# Altium PCB ESP32 with USBC PCB V1.PcbDoc (part 2 of 2)
Units mil, origin at the board's own origin, x right, y up, seen from the top; angles counter-clockwise.
Board outline 2700 x 1000 mil, 4 copper layers (L1, L2, L3, L4), stack 61.581 mil thick; 66 components, 75 nets, 307 pads, 155 vias.
Unrouted connection lines stored in the file: 1.
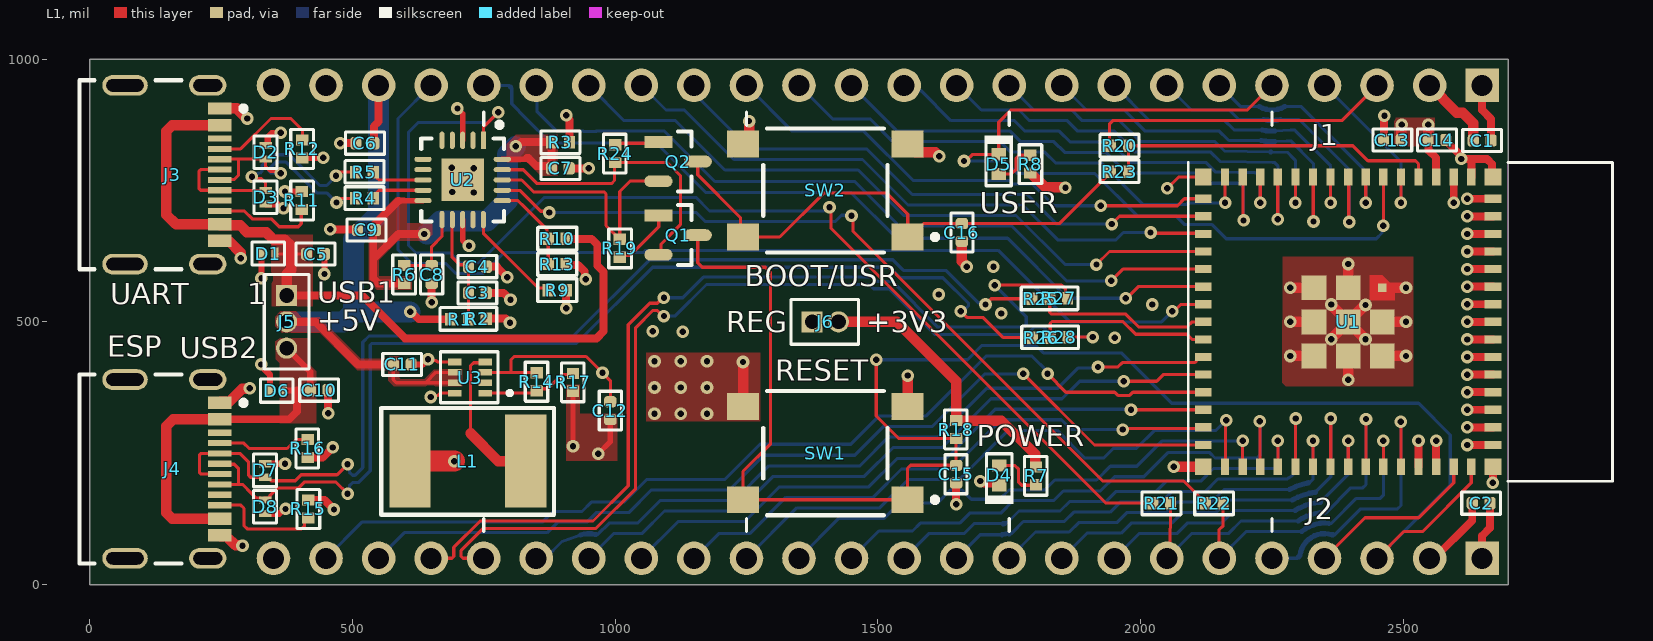
[diagram p0: L1 view]

## Via types
v1: diameter 24, hole 12, L1 to L4, tented both sides, 155 vias

## Nets (pads, with @x,y where several pads share a name; then routed paths per layer and width w, separated by ;. In a path a pad name is that pad's centre, name@x,y a point inside that pad or via, vN(x,y) a via of type N, cw(c..) or ccw(c..) an arc to the next point about the centre after c; other vN are vias at no path point) (continued)
GPIO11: (continued)
  L4 w6: J1.14 1414,886 1485.72,886 1528.72,843 1733,843 1753,823 1818,823 1838.64,802.36 1925.79,802.36 2005.15,723 2086.4,723 2089.83,726.43 v1(2160.79,726.43)
GPIO12: J1.15 U1.16 | length 969.8
  L1 w6: v1(1924,721) 2070.18,721 2083.44,734.25 U1.16
  L4 w6: J1.15 1337,863 1473.42,863 1567.42,769 1750.43,769 1757.07,762.36 1794,762.36 1835.36,721 v1(1924,721)
GPIO13: J1.16 U1.17 | length 1093.7
  L1 w6: v1(1945,686) 1959.79,700.79 U1.17
  L4 w6: J1.16 1150,935.39 1165.73,919.65 1165.73,919.27 1256,829 1479.14,829 1565.78,742.36 1784,742.36 1840.36,686 v1(1945,686)
GPIO14: J1.17 U1.18 | length 1198.1
  L1 w6: v1(2019,670) 2020.34,668.66 2118.11,668.66 U1.18
  L4 w6: J1.17 1097,903 1132,903 1226,809 1470.85,809 1557.49,722.36 1775.72,722.36 1842.07,656 1953.18,656 1967.18,670 v1(2019,670)
GPIO15: J1.18 U1.19 | length 1321
  L1 w6: v1(1916,609) 1940.86,633.86 U1.19
  L4 w6: J1.18 1017,883 1115,883 1209,789 1462.57,789 1549.21,702.36 1763,702.36 1856.36,609 v1(1916,609)
GPIO16: J1.19 U1.20 | length 1461.8
  L1 w6: v1(1944,578) 1966.39,600.39 U1.20
  L4 w6: J1.19 851.14,948.86 851.14,900.86 889,863 939.82,863 940.82,862 963.18,862 964.18,863 1094,863 1190,767 1456.28,767 1540.93,682.36 1754.72,682.36 1859.07,578 v1(1944,578)
GPIO17: J1.20 U1.21 | length 1563.9
  L1 w6: v1(1972,545) 1973.4,545 1995.33,566.93 U1.21
  L4 w6: J1.20 798.03,950 800.95,947.07 803.3,944.73 803.3,914.7 831.2,886.8 877.64,840.36 1078.64,840.36 1173,746 1449,746 1536,659 1747,659 1861,545 v1(1972,545)
GPIO18: J1.21 U1.22 | length 1978.6
  L1 w6: v1(2060,520) 2063.79,520 2077.02,533.23 2119.22,533.23 U1.22
  L4 w6: J1.21 587,887 587,637 613,611 678,611 697,592 749.1,592 789.1,632 1054.31,632 1058.32,636.01 1728.99,636.01 1865,500 2040,500 v1(2060,520)
GPIO21: J2.19 U1.25 | length 1426.1
  L1 w6: v1(1919,414) 1956.82,414 1965.3,422.48 2102.84,422.48 2108.7,428.34 2108.7,430.2 2111.57,433.07 U1.25
  L4 w6: J2.19 867,50 899,82 934.41,94.34 ; 961.84,95.48 963.06,95.48 967.2,95.48 988.72,117 1042.72,117 1085.72,160 1226.72,160 1292.72,226 1466.15,226 1521.15,281 1614.43,281 1707,373.57 1842.28,373.57 1880.72,412 1917,412 v1(1919,414)
  L4 w10: 934.41,94.34 cw(c950,50) 961.84,95.48
GPIO26: J2.18 U1.26 | length 1314.3
  L1 w6: v1(1968,387) 2030.61,387 2043.21,399.61 U1.26
  L4 w6: J2.18 997,97 1051,97 1094,140 1235,140 1301,206 1474.43,206 1529.43,261 1622.72,261 1715.28,353.57 1850.57,353.57 1884,387 v1(1968,387)
GPIO33: J2.17 U1.28 | length 1187.3
  L1 w6: v1(1981.68,332.68) U1.28
  L4 w6: J2.17 1120,120 1247,120 1313,186 1482.72,186 1536.72,240 1630,240 1723.57,333.57 1980.79,333.57 v1(1981.68,332.68)
GPIO34: J2.16 U1.29 | length 1088.1
  L1 w6: v1(1966,295) 1968.11,297.11 2117.34,297.11 U1.29
  L4 w6: J2.16 1197,97 1256,97 1325,166 1491,166 1545,220 1641,220 1734.57,313.57 1849.42,313.57 1867.99,295 v1(1966,295)
GPIO35: J2.15 U1.31 | length 1155
  L1 w6: U1.31 2161.89,225.52 2161.89,311.89 v1(2163,313)
  L4 w6: J2.15 1346,146 1503.72,146 1557.72,200 1654.82,200 1748.38,293.57 1841.14,293.57 1893.7,241 1930.04,241 1948.04,259 1992.07,259 2026.64,293.57 2143.57,293.57 v1(2163,313)
GPIO36: J2.14 U1.32 | length 1000.7
  L1 w6: U1.32 v1(2194.25,273.57)
  L4 w6: J2.14 1426,126 1512,126 1541,155 1612.82,155 1637.82,180 1660.41,180 1678.12,162.3 1732.01,162.3 1749.72,180 1818,180 1837,199 1916.32,199 1942.5,225.18 1993,225.18 2041.38,273.57 v1(2194.25,273.57)
GPIO37: J2.13 U1.33 | length 1019
  L1 w6: v1(2227,311) 2227.36,310.64 2227.36,224.77 U1.33
  L4 w6: J2.13 1502,102 1566,102 1581,117 1655.72,117 1674.72,136 1734,136 1758,160 1835,160 1853,178 1923.61,178 1950.79,205.18 2006,205.18 2052.02,251.2 2131.48,251.2 2141.68,241 2221.86,241 2227.72,246.86 2227.72,310.28 v1(2227,311)
GPIO38: J2.12 U1.34 | length 879.5
  L1 w6: U1.34 v1(2261.18,273.57)
  L4 w6: J2.12 1597,97 1664,97 1683,116 1738.47,116 ; 1741.46,116.45 1741.99,116.52 1748.64,119.93 ; 1748.68,119.96 1768.72,140 1846.72,140 1864.72,158 1933.72,158 1952.72,177 2029,177 2049,197 2114.72,197 2138.72,221 2255.32,221 2261.18,226.86 v1(2261.18,273.57)
  L4 w10: 1738.47,116 cw(c1750,50) 1741.46,116.45
GPIO39: J2.11 U1.35 | length 905.4
  L1 w6: U1.35 2294.82,224.59 2294.82,315.82 v1(2295,316)
  L4 w6: J2.11 1695,95 1736.44,95 ; 1750,97 1754,97 1756.93,99.93 1777,120 1855,120 1873,138 1942,138 1961,157 2039,157 2059,177 2123,177 2147,201 2276.46,201 2278.67,201 2287.9,206.99 2289.12,207.97 2289.91,208.68 2295,213.77 v1(2295,316)
  L4 w10: 1736.44,95 cw(c1750,50) 1750,97
GPIO40: J2.10 U1.36 | length 759.7
  L1 w6: U1.36 v1(2328.11,273.57)
  L4 w6: J2.10 1800,100 1864,100 1882,118 1954.72,118 1973.72,137 2049,137 2069,157 2134.72,157 2158.72,181 2280.95,181 2283.31,181 ; 2319.62,193.83 2322.25,194.38 2328.11,200.24 v1(2328.11,273.57)
  L4 w10: 2283.31,181 cw(c2350,50) 2319.62,193.83
GPIO41: J2.9 U1.37 | length 775.4
  L1 w6: U1.37 2361.79,224.62 2361.79,315.79 v1(2362,316)
  L4 w6: J2.9 1898,98 1963,98 1982,117 2059,117 2079,137 2143,137 2167,161 2288.29,161 ; 2332.72,175.82 2362,205.1 v1(2362,316)
  L4 w10: 2288.29,161 cw(c2350,50) 2332.72,175.82
GPIO42: J2.8 U1.38 | length 620.6
  L1 w6: U1.38 v1(2395.04,273.57)
  L4 w6: J2.8 1997,97 2068.72,97 2088.72,117 2154,117 2178,141 2293.72,141 ; 2341.87,156.69 2395.04,209.86 v1(2395.04,273.57)
  L4 w10: 2293.72,141 cw(c2350,50) 2341.87,156.69
GPIO45: J2.5 U1.41 | length 538.2
  L1 w6: v1(2495,310) 2495.22,309.78 2495.22,224.63 U1.41
  L4 w6: J2.5 2298.03,50 2300.95,52.93 2303.3,55.27 ; 2364.19,94.81 2365.66,94.81 2369.81,94.81 2419,144 2489,144 2495.43,150.43 2495.43,309.57 v1(2495,310)
  L4 w10: 2303.3,55.27 cw(c2350,50) 2364.19,94.81
GPIO46: J2.4 U1.44 | length 336
  L1 w6: J2.4 2427.08,127.08 2529.08,127.08 2595.83,193.83 U1.44
GPIO47: J2.23 U1.27 | length 1864.8
  L1 w6: v1(1823,401) 1857.86,366.14 1950.67,366.14 1956.82,360 1979.18,360 1985.33,366.14 U1.27
  L4 w6: J2.23 519.28,119.28 862.72,119.28 882.43,139 937,139 955,157 1017,157 1060,200 1208.72,200 1275.72,267 1448.72,267 1502.72,321 1592,321 1706,435 1792.79,435 1823,404.79 v1(1823,401)
GPIO48: J2.22 U1.30 | length 1770.9
  L1 w6: v1(1777,401) 1912.25,265.75 U1.30
  L4 w6: J2.22 599,99 870.72,99 890.72,119 946,119 964,137 1026,137 1069,180 1217,180 1283,246 1456,246 1511,301 1604,301 1704,401 v1(1777,401)
NetD4_2: D4.2 R7.1 | length 100.4
  L1 w6: D4.2 1760.7,226.7 1768,219.4 1768,194.86 1773.86,189 1800.01,189 R7.1
NetD5_2: D5.2 R8.1 | length 87.1
  L1 w6: D5.2 1754.29,781.3 1763.13,790.14 1763.13,811.15 1768.99,817.01 R8.1
NetJ3_A5: J3.A5 R12.2 | length 209.4
  L1 w6: J3.A5 287.44,829.13 345.3,887 383,887 405,865 R12.2
NetJ3_B5: J3.B5 R11.2 | length 197.8
  L1 w6: J3.B5 294.72,711.02 309.73,696.01 345.93,696.01 360.94,681 397.14,681 403,686.86 403,712.98 R11.2
NetJ4_A5: J4.A5 R16.2 | length 178.7
  L1 w6: J4.A5 293.71,269.29 303.98,259.02 376.02,259.02 393.02,276.02 R16.2
NetJ4_B5: J4.B5 R15.2 | length 220.8
  L1 w6: J4.B5 287.82,151.18 294,145 294,111.86 299.86,106 403.33,106 409.19,111.86 409.19,121.37 414.82,127 R15.2
NetL1_1: L1.1 U3.4 | length 286.5
  L1 w6: 724.94,288.06 724.94,416.37 730.8,422.23 751.64,422.23 U3.4
  L1 w20: 724.94,288.06 778,235 L1.1
NetQ1_1: Q1.1 R19.2 | length 119.6
  L1 w6: R19.2 1012.83,626.82 1028.82,626.82 1083,681 1083,701.98 Q1.1
NetQ2_1: Q2.1 R24.2 | length 84.8
  L1 w6: R24.2 1002.7,839.7 1079.88,839.7 Q2.1
NetR9_1: R9.1 U2.15 | length 194.7
  L1 w6: U2.15 749.37,677 749.37,668.63 785.59,632.41 785.78,632.41 822,596.18 822,596 853.67,564.33 868.66,564.33 R9.1
NetR14_1: R14.1 R17.2 U3.1 | length 190.1
  L1 w6: U3.1 846.48,364.47 853.64,371.64 R14.1 854.82,372.82 871.82,372.82 899.05,400.05 918.04,400.05 R17.2
RTS_FTDI: Q1.2 R24.1 U2.19 | length 564.2
  L1 w6: U2.19 785.64,789.46 806.91,789.46 807,789.37 825.63,789.37 852,763 993.14,763 999,768.86 999,801.99 R24.1 1099.78,802.99 1124.29,778.48 1124.29,684.93 1087.37,648 1087.37,632.39 Q1.2
RXD_FTDI: R21.2 U2.1 | length 2217.7
  L1 w6: U2.1 749.37,870.37 v1(778,899) ; v1(1408,718) 1410.68,715.32 1410.68,678.5 1934.18,155 R21.2
  L4 w6: v1(778,899) 758,879 625,879 607,861 607,645.28 621.28,631 686.28,631 705.28,612 740.82,612 865.63,736.81 1153.9,736.81 1179.72,711 1397.21,711 1404.21,718 v1(1408,718)
TXD_FTDI: R22.2 U2.17 | length 1610.5
  L1 w6: U2.17 785.64,750.09 818.91,750.09 827,742 858.65,710.35 872.65,710.35 v1(875,708) ; v1(1450,702) 1452.68,699.32 1452.68,672.32 1927.8,197.2 2081.97,197.2 2122.99,156.18 R22.2
  L4 w6: v1(875,708) 1154.43,708 1171.43,691 1419.18,691 1431,702.82 1449.18,702.82 v1(1450,702)
U0RXD: J2.6 R22.1 U1.40 | length 620.7
  L1 w6: J2.6 2149,51 2149,104 2157.01,112.01 R22.1 ; U1.40 v1(2461.97,273.57)
  L4 w6: J2.6 2201,101 2306.55,101 ; 2358.43,116.47 2363.18,116.47 2410.72,164 2456.11,164 2461.97,169.86 v1(2461.97,273.57)
  L4 w10: 2306.55,101 cw(c2350,50) 2358.43,116.47
U0TXD: J2.7 R21.1 U1.39 | length 757.2
  L1 w6: J2.7 2056,56 2056,107 2057.01,108.01 R21.1 ; U1.39 2428.75,224.66 2428.75,314.75 v1(2429,315)
  L4 w6: J2.7 2097,97 2167,97 2191,121 2296.63,121 2299.72,121 ; 2351.1,136.99 2352.99,136.99 2400,184 2422.65,184 2429,190.35 v1(2429,315)
  L4 w10: 2299.72,121 cw(c2350,50) 2351.1,136.99
VBUS_SENSE: R10.1 R13.2 U2.16 | length 175.6
  L1 w6: U2.16 815.37,730.63 827,719 870.7,675.3 870.7,660.29 R10.1 ; R13.2 R10.1@872.99,659.18
pads on no net: J1.24 J3.A8 J3.B8 J4.A8 J4.B8 U2.2 U2.4 U2.5 U2.6 U2.7 U2.14 U3.2

## Polygon pours and split planes (outlines as drawn)
+3V3_FTDI on L1 "+3V3_FTDI_L01_P004" (solid, pour order 4): 613.22,560.7 546.22,560.7 531,577.9 531,684.72 540,694 544.22,698.7 584.22,738.7 603.22,738.7 603.22,687.7 652.22,687.7 652.22,659.7 647.22,654.7 587.7,654.7 550,617 550,586.7 613.22,586.7
GND on L1 "GND_L01_P008" (solid, pour order 8): 2270.5,624 2519,624 2519,377 2269.5,377
GND on L1 "GND_L01_P010" (solid, pour order 10): 1059,441 1059,311 1276,311 1276,441
GND on L1 "GND_L01_P009" (solid, pour order 9): 1004,325 1004,236 907,236 907,380 933,380 933,325
+5V_VBUS2 on L1 "+5V_VBUS2_L01_P007" (solid, pour order 7): 362,421 354,429 353.73,470 416,470 416,421 431,406 431,307 362,307
+5V_VBUS1 on L1 "+5V_VBUS1_L01_P006" (solid, pour order 6): 346.62,530 425,530 425,666 345.79,666
+5V on L1 "+5V_L01_P005" (solid, pour order 5): 709,410 709,377 579,377 568,388 568,404 569,405 566,408 509,408 438,479 366,479 353,492 353,510 366,523 390,523 404,509 438,509 438,508 516,430 566,430 571,435 589,435 589,394 592,391 637,391 656,410
+3V3_FTDI on L1 "+3V3_FTDI_L01_P001" (solid, pour order 1): 891,856 891,855 891,778 854,778 828.5,803.5 794,804 794,839 811,856
+3V3 on L1 "+3V3_L01_P000" (solid, pour order 0): 2483,834 2484,834 2559,834 2559,868 2560,869 2560,888 2483,888
GND on L2 "GND_L02_P012" (solid, pour order 12): 20,20 27.85,12.15 2687.85,12.15 2687.85,986.15 2687,987 2680,980 20,980
+3V3 on L2 "+3V3_L02_P011" (solid, pour order 11): 2687.85,12.15 2687,987 909,987 908,988 908,930.96 886.52,909.48 886.52,839 1059,839 1288,610 1403,610 1403,473 1447,473 1447,634 1788,634 1940,786 2553.66,786 2554.02,352.28 2511,273.69 2511,160.25 2334.8,160.25 2298,130.77 2298,12.15
GND on L3 (split plane): 2699.95,0.05 0.05,0.05 0.05,999.95 2699.95,999.95

## Silkscreen, mask and mechanical layers (free items; w line width, h text height)
Top Overlay:
  lines w6: 750,101 750,126 ; 750,874 750,899 ; 1250,101 1250,126 ; 1250,874 1250,899 ; 1750,101 1750,126 ; 1750,874 1750,899 ; 2250,101 2250,126 ; 2250,874 2250,899
  text "J1" at 2325,836 h40
  text "USER" at 1694,707 h40
  text "BOOT/USR" at 1247,568 h40
  text "USB1" at 433,536 h40
  text "UART" at 39,533 h40
  text "+5V" at 433,483 h40
  text "REG" at 1212,480 h40
  text "+3V3" at 1478,480 h40
  text "ESP" at 34,434 h40
  text "USB2" at 172,431 h40
  text "RESET" at 1305,388 h40
  text "POWER" at 1688,263 h40
  text "J2" at 2315,124 h40
Bottom Overlay:
  text "NC" at 370,858 h40 r90
  text "GND" at 470,858 h40 r90
  text "+5V" at 570,858 h40 r90
  text "IO18" at 670,858 h40 r90
  text "IO17" at 770,858 h40 r90
  text "IO16" at 870,858 h40 r90
  text "IO15" at 970,858 h40 r90
  text "IO14" at 1070,858 h40 r90
  text "IO13" at 1170,858 h40 r90
  text "IO12" at 1270,858 h40 r90
  text "IO11" at 1370,858 h40 r90
  text "IO10" at 1470,858 h40 r90
  text "IO9" at 1570,858 h40 r90
  text "IO8" at 1670,858 h40 r90
  text "IO7" at 1770,858 h40 r90
  text "IO6" at 1870,858 h40 r90
  text "IO5" at 1970,858 h40 r90
  text "IO4" at 2070,858 h40 r90
  text "IO3" at 2170,858 h40 r90
  text "IO2" at 2270,858 h40 r90
  text "IO1" at 2370,858 h40 r90
  text "IO0" at 2470,858 h40 r90
  text "+3V3" at 2570,858 h40 r90
  text "GND" at 2670,858 h40 r90
  text "<--PIN1-->" at 2672,706 h40 r90
  text "(C) 2024 Amira" at 1757,391 h40
  text "GND" at 368,292 h40 r90
  text "IO47" at 468,292 h40 r90
  text "IO48" at 568,292 h40 r90
  text "USB-" at 668,292 h40 r90
  text "USB+" at 768,292 h40 r90
  text "IO21" at 868,292 h40 r90
  text "IO26" at 968,292 h40 r90
  text "IO33" at 1068,292 h40 r90
  text "IO34" at 1168,292 h40 r90
  text "IO35" at 1268,292 h40 r90
  text "IO36" at 1368,292 h40 r90
  text "IO37" at 1468,292 h40 r90
  text "IO38" at 1568,292 h40 r90
  text "IO39" at 1668,292 h40 r90
  text "IO40" at 1768,292 h40 r90
  text "IO41" at 1868,292 h40 r90
  text "IO42" at 1968,292 h40 r90
  text "TXD" at 2068,292 h40 r90
  text "RXD" at 2168,292 h40 r90
  text "IO45" at 2268,292 h40 r90
  text "IO46" at 2368,292 h40 r90
  text "EN" at 2468,292 h40 r90
  text "GND" at 2568,292 h40 r90
  text "+3V3" at 2668,292 h40 r90
Board Shape:
  the board outline again, w20

## Text inside footprints (layer, text, board x,y; h text height)
J1: Bottom Overlay "1" at 2631,1021 h40 r270
J2: Bottom Overlay "1" at 2634,-46 h40 r270
J5: Top Overlay "1" at 300,533 h40